# Altium PCB rectangle11board.PcbDoc
Units mil, origin at the board's own origin, x right, y up, seen from the top; angles counter-clockwise.
Board outline 1732.28 x 2598.43 mil, 4 copper layers (Top Layer, Mid-Layer 1, Mid-Layer 2, Bottom Layer), stack 43.512 mil thick; 34 components, 30 nets, 241 pads, 314 vias.
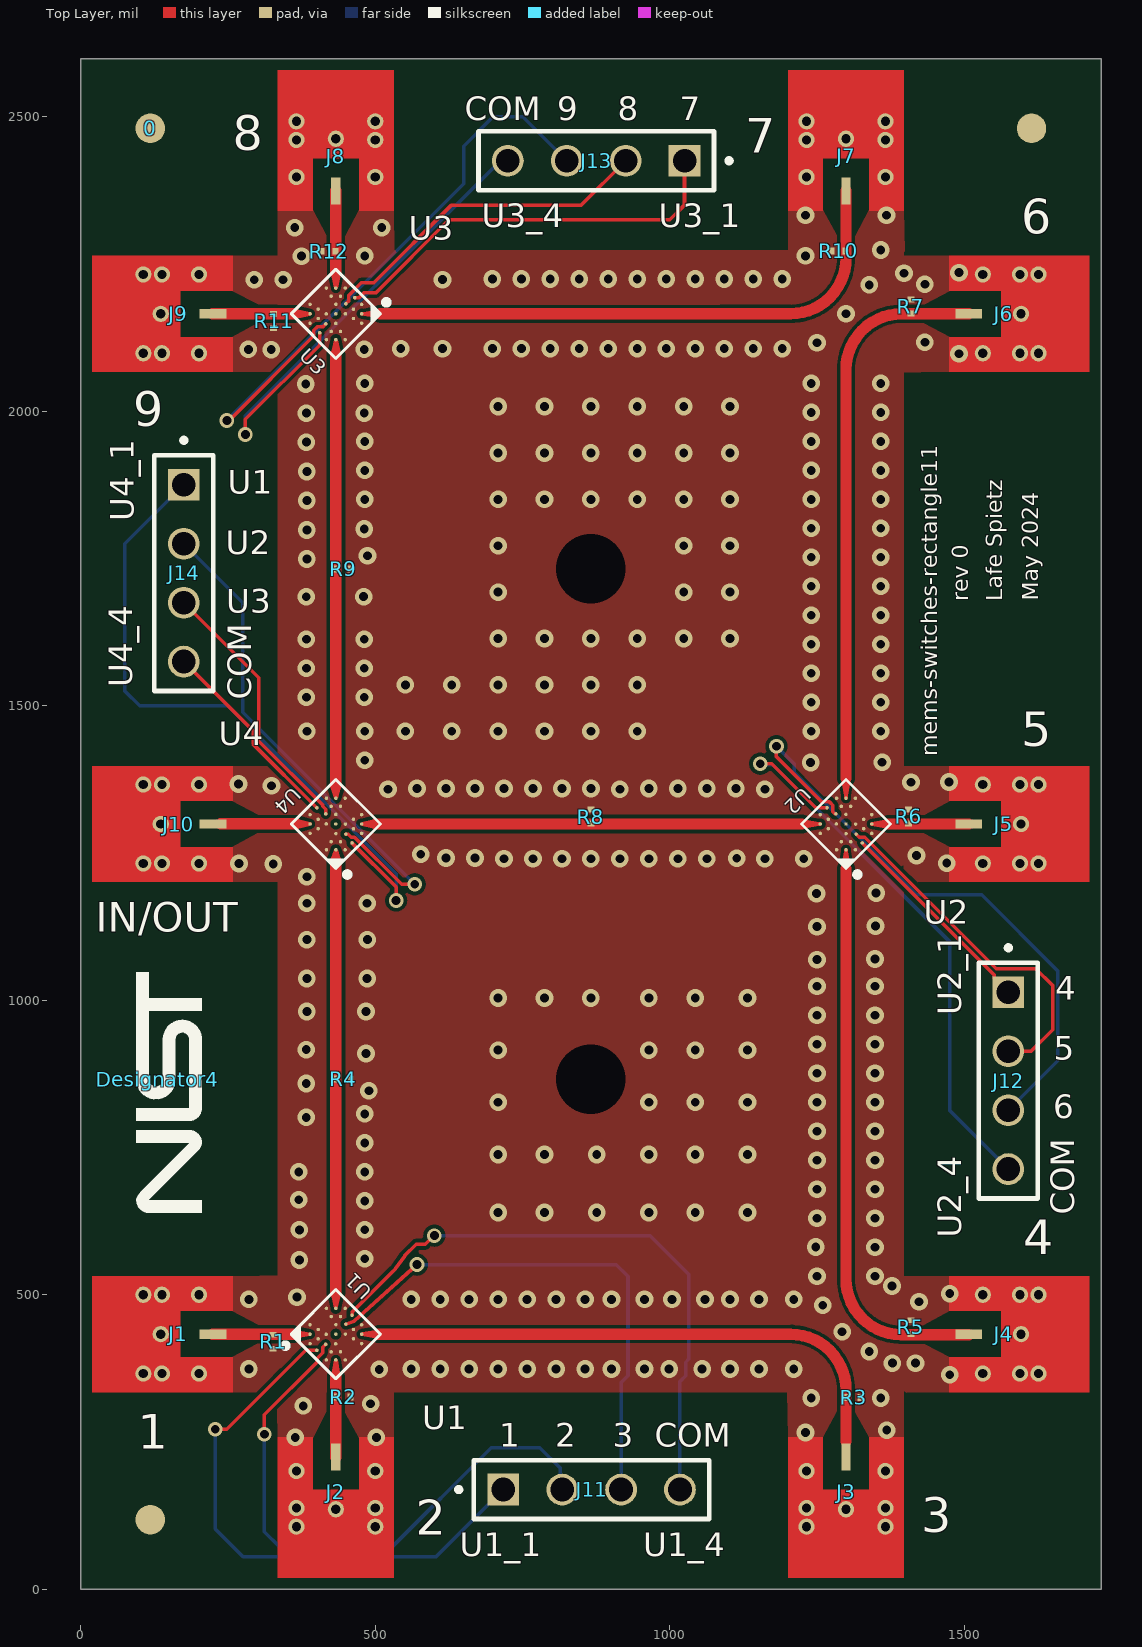
[diagram p0: Top Layer view]
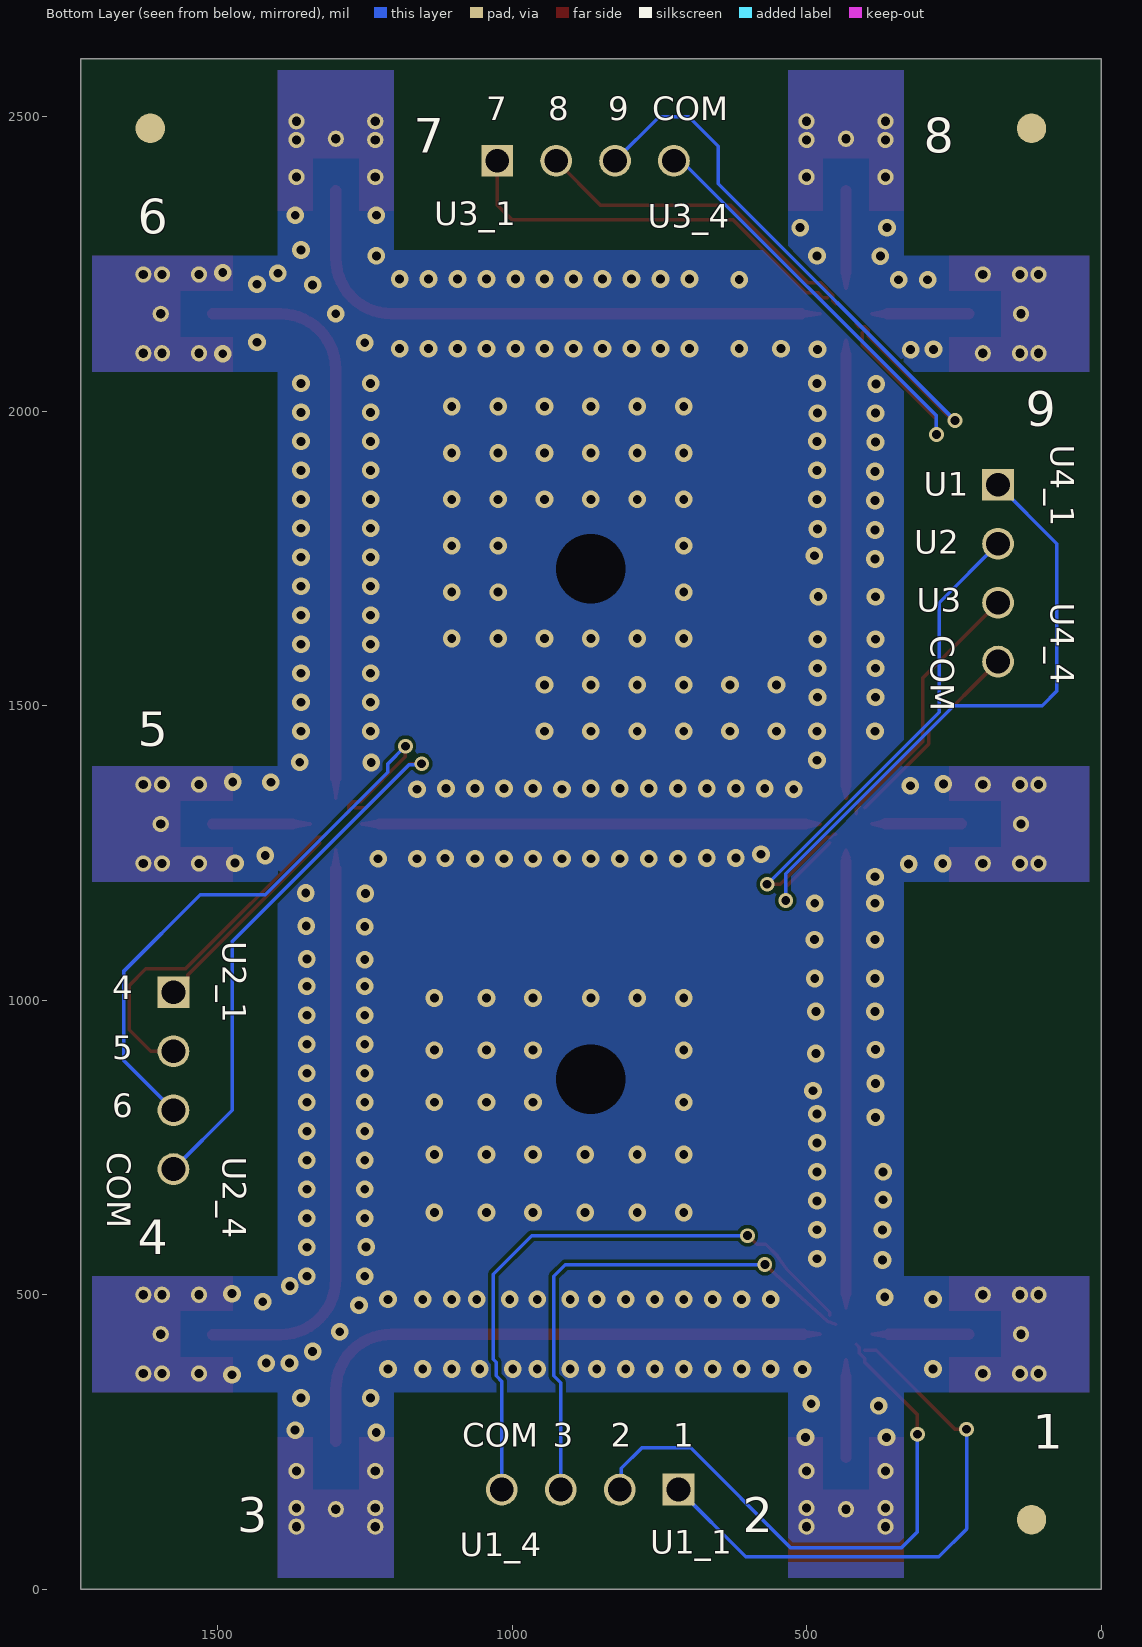
[diagram p1: Bottom Layer view, seen from below]
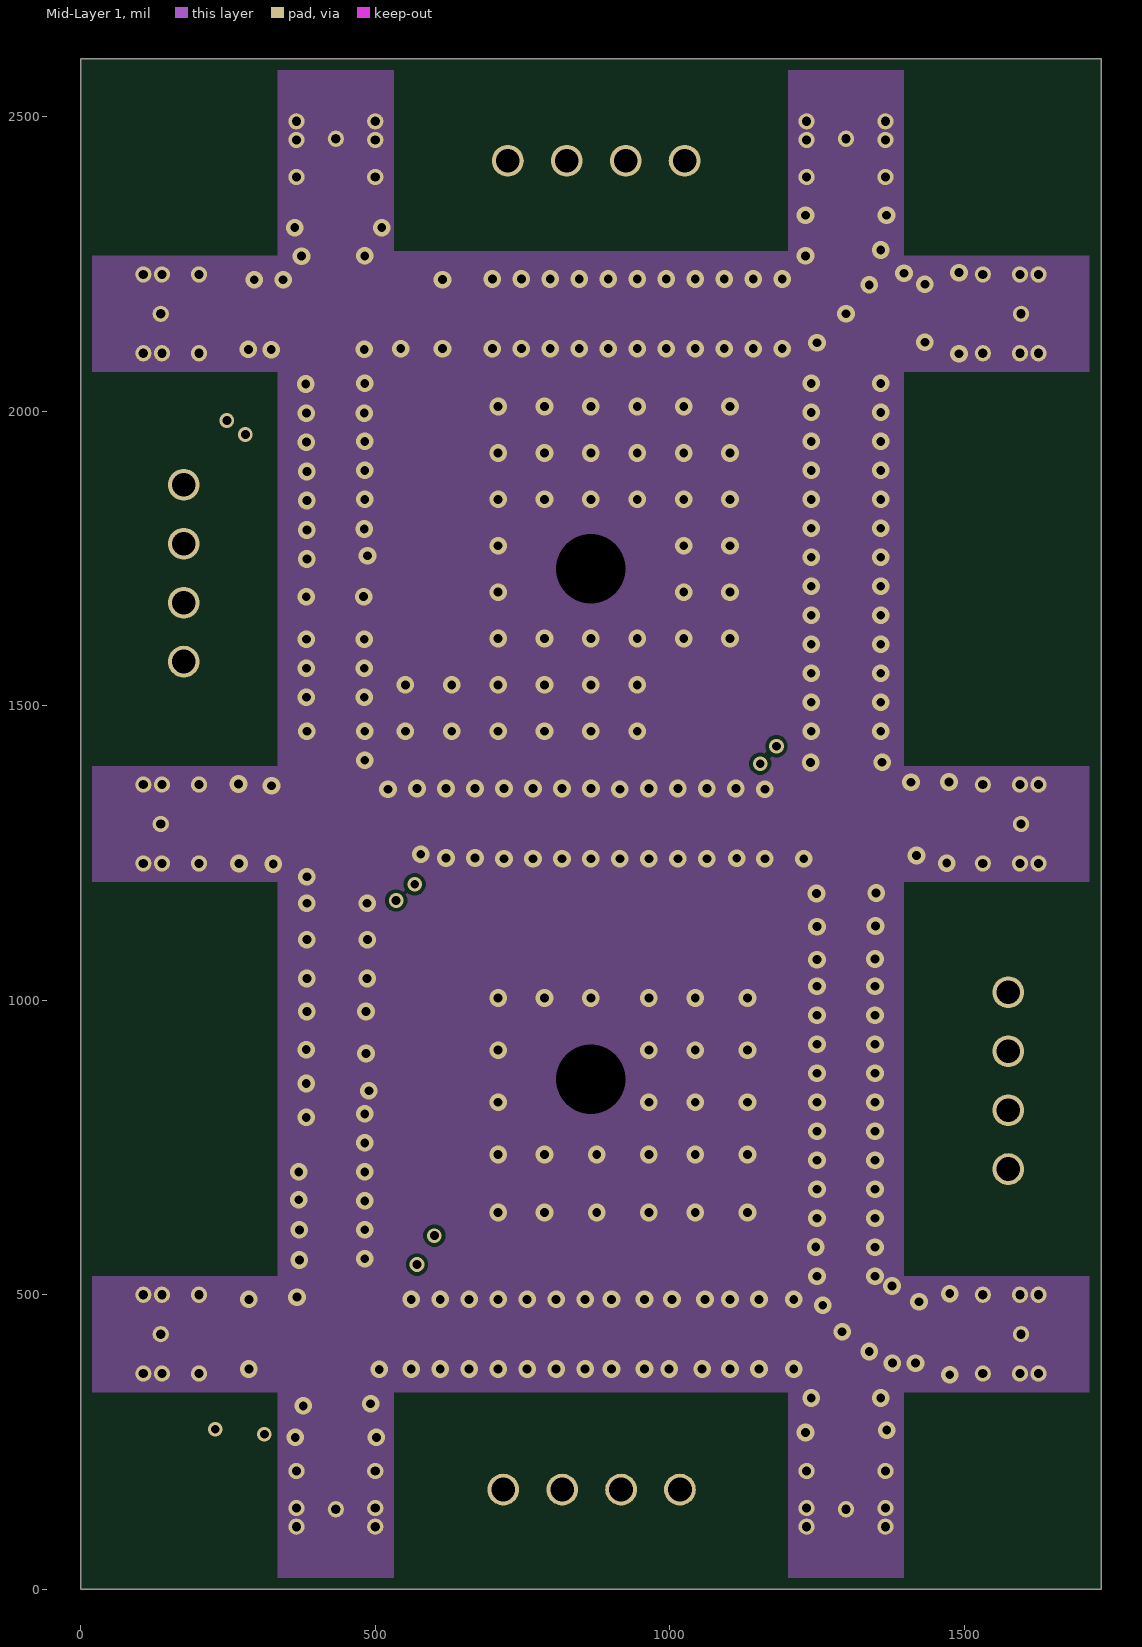
[diagram p2: Mid-Layer 1]
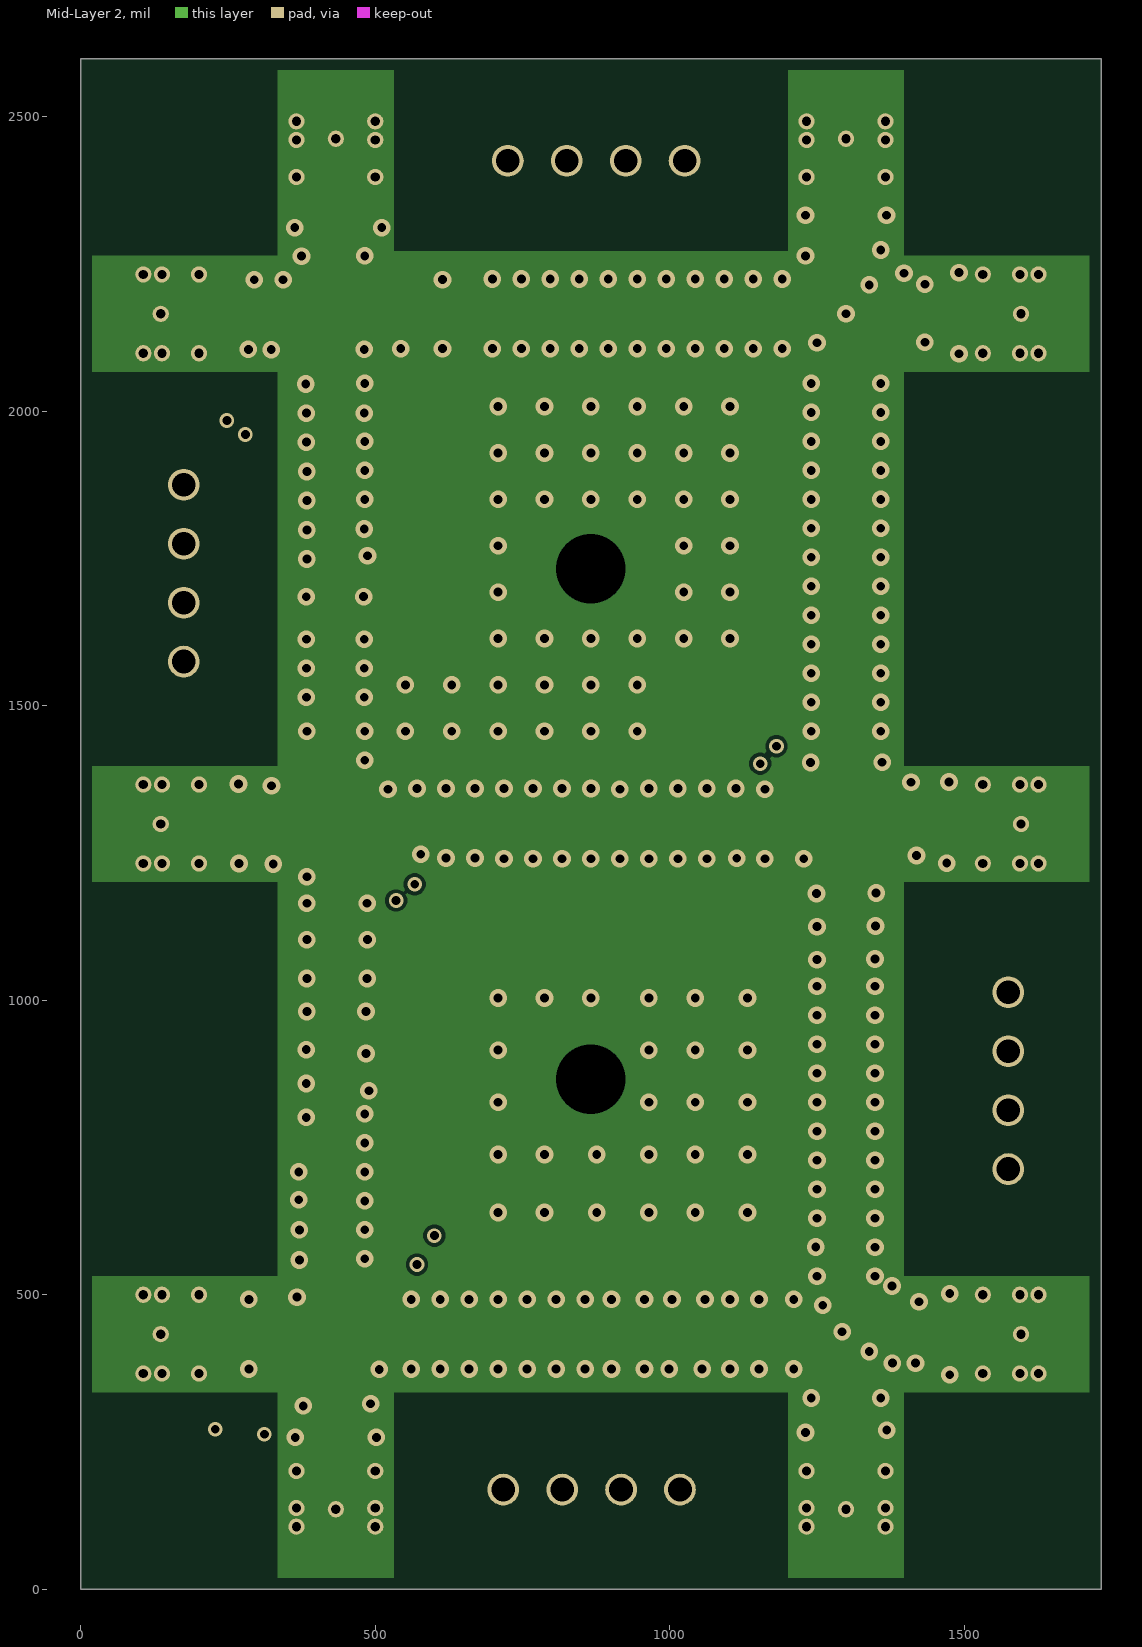
[diagram p3: Mid-Layer 2]

## Layer stack, top to bottom
Top Solder: solder mask 1, SM-001, Dk 4
Top Layer: signal copper 1.378
Core1: dielectric 10, RO4350B, Dk 3.48
Mid-Layer 1: signal copper 1.378
Dielectric 1: prepreg 7, PR7628, Dk 4.24
Dielectric 2: prepreg 4, PR2116, Dk 4.17
Dielectric 3: prepreg 7, PR7628, Dk 4.24
Mid-Layer 2: signal copper 1.378
Core2: dielectric 10, RO-4350B, Dk 3.48
Bottom Layer: signal copper 1.378
Bottom Solder: solder mask 1, SM-001, Dk 4

## Board outline
0,0 0,2598.43 1732.28,2598.43 1732.28,0

## Design rules (kind name [scope] priority, off if disabled: settings)
Clearance [All] p1: gap=10 ignorepadtopadclearanceinfootprint=FALSE except(3.74: Track-Region SMDPad-Region Region-Region; 3.94: Track-Track Track-SMDPad; 4: Track-Fill; 6: Arc-SMDPad Arc-THPad Arc-Poly Track-Poly SMDPad-SMDPad SMDPad-Poly THPad-Poly Via-Poly Fill-Poly Poly-Poly Poly-Region Poly-Hole)
HoleSize [All] p1: absolutevalues=TRUE maxlimit=250 minlimit=1 maxpercent=80.000 minpercent=20.000
PolygonConnect [All] p1: connectstyle=Direct reliefconductorwidth=10 reliefentries=4 polygonreliefangle="90 Angle" airgapwidth=10
RoutingVias [All] p1: holewidth=15 width=25 viastyle="Through Hole" minholewidth=5 minwidth=10 maxholewidth=28 maxwidth=50
SolderMaskExpansion [All] p1: expansion=4 istentingtop=FALSE
Width [All] p1 off: maxlimit=21.65 minlimit=3.94 preferedwidth=10 toplayer_prefwidth=3.94 midlayer1_minwidth=10 midlayer1_maxwidth=10 midlayer2_minwidth=10 midlayer2_maxwidth=10 bottomlayer_minwidth=10 bottomlayer_maxwidth=10 minimp=50.000000 maximp=50.000000 favimp=50.000000
Width cpw-Z-1 [All] p2 off: maxlimit=19.68 minlimit=6.87 preferedwidth=10 toplayer_minwidth=12.7 toplayer_prefwidth=15.98 impedanceprofiledriven=TRUE impedanceprofileid={FF6547F1-1ACB-4B88-A69B-03F59FE56022} minimp=50.000000 maximp=50.000000 favimp=50.000000
29 further rules are at their usual default settings.

## Classes and differential pairs
component class rectangle11board: J1 J2 J3 J4 J5 J6 J7 J8 J9 J10 J11 J12 J13 J14 R1 R2 R3 R4 R5 R6 R7 R8 R9 R10 R11 R12 U1 U2 U3 U4

## Components (designator, comment, footprint, x,y, rotation, side; value= is the part's Value field where it differs from the comment)
0 "Fiducial" fiducial 118.11,2480.32 r90 top
Designator4 "Comment" "NIST logo - TopOverlay" 129.92,866.14 r90 top
J1 "SMP-right-angle-19S201-40ML5" rosenberger-19S201-40ML5 118.11,433.07 r90 top
J2 "SMP-right-angle-19S201-40ML5" rosenberger-19S201-40ML5 433.07,118.11 r180 top
J3 "SMP-right-angle-19S201-40ML5" rosenberger-19S201-40ML5 1299.21,118.11 r180 top
J4 "SMP-right-angle-19S201-40ML5" rosenberger-19S201-40ML5 1614.17,433.07 r270 top
J5 "SMP-right-angle-19S201-40ML5" rosenberger-19S201-40ML5 1614.17,1299.21 r270 top
J6 "SMP-right-angle-19S201-40ML5" rosenberger-19S201-40ML5 1614.17,2165.35 r270 top
J7 "SMP-right-angle-19S201-40ML5" rosenberger-19S201-40ML5 1299.21,2480.32 r0 top
J8 "SMP-right-angle-19S201-40ML5" rosenberger-19S201-40ML5 433.07,2480.32 r0 top
J9 "SMP-right-angle-19S201-40ML5" rosenberger-19S201-40ML5 118.11,2165.35 r90 top
J10 "SMP-right-angle-19S201-40ML5" rosenberger-19S201-40ML5 118.11,1299.21 r90 top
J11 "TSW-104-07-G-S" SAMTEC_TSW-104-07-G-S 867.32,169.29 r0 top
J12 "TSW-104-07-G-S" SAMTEC_TSW-104-07-G-S 1574.8,863.39 r270 top
J13 "TSW-104-07-G-S" SAMTEC_TSW-104-07-G-S 875.2,2425.2 r180 top
J14 "TSW-104-07-G-S" SAMTEC_TSW-104-07-G-S 175,1725 r270 top
R1 "TE connectivity CPF0201B56K2E1" 0201-resistor 326.77,420.28 r270 top value=56k
R2 "TE connectivity CPF0201B56K2E1" 0201-resistor 446.06,326.77 r0 top value=56k
R3 "TE connectivity CPF0201B56K2E1" 0201-resistor 1312.01,325.79 r180 top value=56k
R4 "TE connectivity CPF0201B56K2E1" 0201-resistor 446.06,866.14 r180 top value=56k
R5 "TE connectivity CPF0201B56K2E1" 0201-resistor 1409.45,444.88 r270 top value=56k
R6 "TE connectivity CPF0201B56K2E1" 0201-resistor 1405.51,1312.01 r270 top value=56k
R7 "TE connectivity CPF0201B56K2E1" 0201-resistor 1409.41,2177.65 r90 top value=56k
R8 "TE connectivity CPF0201B56K2E1" 0201-resistor 866.14,1311.81 r90 top value=56k
R9 "TE connectivity CPF0201B56K2E1" 0201-resistor 445.7,1732.28 r0 top value=56k
R10 "TE connectivity CPF0201B56K2E1" 0201-resistor 1286.35,2272.12 r0 top value=56k
R11 "TE connectivity CPF0201B56K2E1" 0201-resistor 327.48,2153.15 r270 top value=56k
R12 "TE connectivity CPF0201B56K2E1" 0201-resistor 420.95,2271.61 r180 top value=56k
U1 "MM5130*" MM5130-NORM_PCB_NOFLOOD 433.07,433.07 r45 top
U2 "MM5130*" MM5130-NORM_PCB_NOFLOOD 1299.21,1299.21 r135 top
U3 "MM5130*" MM5130-NORM_PCB_NOFLOOD 433.07,2165.35 r225 top
U4 "MM5130*" MM5130-NORM_PCB_NOFLOOD 433.07,1299.21 r135 top
? "Fiducial" fiducial 1614.17,2480.32 r0 top
? "Fiducial" fiducial 118.11,118.11 r0 top

## Footprints (in the part's own frame and the unit in brackets; to place one, negate y for a bottom-side part, rotate by r counter-clockwise, add the part's x,y. Pads: shape width x height; smd on the part's side, far side on the other; paste and mask are expansions set on the pad)
0201-resistor [mm]
  rect 0.25x0.3 smd: 1(-0.3,0) 2(0.3,0)
fiducial [mil]
  round 50 / inner round 0 / far side round 50 all layers, no hole paste-99999 mask+50: 1(0,0)
MM5130-NORM_PCB_NOFLOOD [mm]
  round 0.15 smd mask+0.025: 1(-1.072,0.5) 2(-1.072,0.084) 3(-1.072,-0.5) 4(-0.786,-0.786) 5(-0.5,-1.072) 6(0.5,-1.072) 7(0.786,-0.786) 8(1.072,-0.5) 9(1.072,0.084) 10(1.072,0.5) 11(0.786,0.786) 12(0.5,1.072) 13(-0.5,1.072) 14(-0.786,0.786) 15(-0.681,0.396) 16(-0.615,0) 17(-0.681,-0.396) 18(-0.396,-0.681) 19(0.396,-0.681) 20(0.681,-0.396) 21(0.615,0) 22(0.681,0.396) 23(0.396,0.681) 24(-0.396,0.681) 25(-0.295,0.29) 26(-0.295,-0.29) 27(0.295,-0.29) 28(0.295,0.29) 29(0,0)
  silkscreen extent -1.99,-1.36 1.36,1.36, body extent -1.27,-1.27 1.27,1.27, height 0.98
"NIST logo - TopOverlay" [mil]
  silkscreen extent -227,-76 181,35
rosenberger-19S201-40ML5 [mm]
  rect 0.4x1.15 smd: 1(0,-2.7)
  round 0.7 hole 0.4 mask+0: gnd(-1.7,-2.1) gnd(-1.7,-0.5) gnd(-1.7,0.3) gnd(0,-0.45) gnd(1.7,-2.1) gnd(1.7,-0.5) gnd(1.7,0.3)
  Top Layer region: 1,-1.3 1,-3.55 2.5,-3.55 2.5,2.5 -2.5,2.5 -2.5,-3.55 -1,-3.55 -1,-1.3
  body extent -2.5,-2.75 2.5,2.5, height 5
SAMTEC_TSW-104-07-G-S [mm]
  rect 1.37x1.37 / inner round 1.37 / far side rect 1.37x1.37 hole 1.02: 01(-3.81,0)
  round 1.37 hole 1.02: 02(-1.27,0) 03(1.27,0) 04(3.81,0)
  silkscreen extent -5.83,-1.27 5.08,1.27

## Part data
J1 J2 J3 J4 J5 J6 J7 J8 J9 J10: "SMOOTH BORE SMP Connector Plug, Male Pin 50Ohm Surface Mount Solder", Package=None, Supplier Part Number 1=476-19S201-40ML5, Availability="In Stock", Check_prices=https://www.snapeda.com/parts/853050232/Molex/view-part/?ref=eda, MF=Molex, MP=853050232, Price=None, Purchase-URL=https://pricing.snapeda.com/search/part/853050232/?ref=eda, SnapEDA_Link=https://www.snapeda.com/parts/853050232/Molex/view-part/?ref=snap, Supplier 1=Mouser
J11 J12 J13 J14: "<a href=\"https://pricing.snapeda.com/parts/TSW-104-07-G-S/Samtec/view-part?ref=eda\">Check availability</a>", Package=None, Availability=Unavailable, MP=altium_native_batch, Price=None
R1 R2 R3 R4 R5 R6 R7 R8 R9 R10 R11 R12: "CPF 0201 56K2 0.1% 25PPM 1K RL", Mfgr Part No.=CPF0201B56K2E1, Package=None, Availability=Unavailable, Mfgr="TE connectivity", MP=ERJ1GN0R00C, Price=None
U1 U2 U3 U4: library part IC-MM5130, "High power SP4T MEMs switch"

## Free pads (board coordinates)
  round 60 hole 118.11: 8(866.14,1732.28) 9(866.14,866.14)

## Via types
v1: diameter 30, hole 15, Top Layer to Bottom Layer, 304 vias
v2: diameter 25, hole 15, Top Layer to Bottom Layer, 10 vias

## Nets (pads, with @x,y where several pads share a name; then routed paths per layer and width w, separated by ;. In a path a pad name is that pad's centre, name@x,y a point inside that pad or via, vN(x,y) a via of type N, cw(c..) or ccw(c..) an arc to the next point about the centre after c; other vN are vias at no path point)
GND: J1.gnd J2.gnd J3.gnd J4.gnd J5.gnd J6.gnd J7.gnd J8.gnd J9.gnd J10.gnd pad.8 pad.9 R1.2 R2.2 R3.1 R4.1 R5.1 R6.1 R7.2 R8.2 R9.2 R10.1 R11.2 R12.2 U1.1 U1.3 U1.5 U1.6 U1.8 U1.10 U1.12 U1.13 U1.15 U1.17 U1.18 U1.19 U1.20 U1.22 U1.23 U1.24 U1.25 U1.26 U1.27 U1.28 U2.1 U2.3 U2.5 U2.6 U2.8 U2.10 U2.12 U2.13 U2.15 U2.17 U2.18 U2.19 U2.20 U2.22 U2.23 U2.24 U2.25 U2.26 U2.27 U2.28 U3.1 U3.3 U3.5 U3.6 U3.8 U3.10 U3.12 U3.13 U3.15 U3.17 U3.18 U3.19 U3.20 U3.22 U3.23 U3.24 U3.25 U3.26 U3.27 U3.28 U4.1 U4.3 U4.5 U4.6 U4.8 U4.10 U4.12 U4.13 U4.15 U4.17 U4.18 U4.19 U4.20 U4.22 U4.23 U4.24 U4.25 U4.26 U4.27 U4.28
  other v1: 364.17,257.87 501.97,257.87 1230.58,266.25 1368.38,270.18 377.64,311.33 492.13,314.96 1240.16,324.8 1358.27,324.8 1475.39,364.17 285.43,374.02 506.86,373.27 561.02,374.02 610.24,374.02 659.45,374.02 708.66,374.02 757.87,374.02 807.09,374.02 856.3,374.02 901.13,374.02 957.13,374.02 998.92,374.02 1054.92,374.02 1102.36,374.02 1151.57,374.02 1210.63,374.02 1377.95,383.86 1417.32,383.86 1338.58,403.54 1292.68,437.11 1259.84,482.28 1423.23,488.19 285.43,492.13 561.02,492.13 610.24,492.13 659.45,492.13 708.66,492.13 757.87,492.13 807.09,492.13 856.3,492.13 901.13,492.13 957.13,492.13 1003.94,492.13 1059.94,492.13 1102.36,492.13 1151.57,492.13 1210.63,492.13 367.24,495.95 1475.39,501.97 1377.3,514.73 1250,531.5 1348.43,531.5 371.18,558.94 482.28,561.02 1348.43,580.71 1247.75,581.15 371.18,610.12 482.28,610.24 1250,629.92 1348.43,629.92 708.66,639.76 787.4,639.76 875.98,639.76 964.57,639.76 1043.31,639.76 1131.89,639.76 482.28,659.45 370.08,661.42 1250,679.13 1348.43,679.13 370.08,708.66 482.28,708.66 1250,728.35 1348.43,728.35 708.66,738.19 787.4,738.19 875.98,738.19 964.57,738.19 1043.31,738.19 1131.89,738.19 482.28,757.87 1250,777.56 1348.43,777.56 382.87,801.18 482.28,807.09 708.66,826.77 964.57,826.77 1043.31,826.77 1131.89,826.77 1250,826.77 1348.43,826.77 489.17,846.46 382.99,858.71 1250,875.98 1348.43,875.98 484.25,909.45 708.66,915.35 964.57,915.35 1043.31,915.35 1131.89,915.35 382.99,916.21 1250,925.2 1348.43,925.2 1250,974.41 1348.43,974.41 383.86,980.97 484.25,980.97 708.66,1003.94 787.4,1003.94 866.14,1003.94 964.57,1003.94 1043.31,1003.94 1131.89,1003.94 1250,1023.62 1348.43,1023.62 383.86,1036.97 486.22,1036.97 1250,1069 1348.43,1069.98 383.86,1102.91 486.69,1102.91 1250,1125 1349.41,1125.98 383.86,1164.71 486.22,1164.71 1249.02,1181.1 1350.39,1181.98 383.86,1209.65 326.77,1231.3 268.7,1232.28 1470.25,1232.78 718.5,1240.16 767.72,1240.16 816.93,1240.16 866.14,1240.16 915.35,1240.16 964.57,1240.16 1013.78,1240.16 1062.99,1240.16 1113.71,1240.95 1161.42,1240.16 1227.36,1240.16 620.11,1241.42 669.32,1241.42 1418.91,1245.68 577.25,1247.78 521.65,1358.27 915.35,1358.27 1161.42,1358.27 570.89,1359.53 620.11,1359.53 669.32,1359.53 718.53,1359.53 767.74,1359.53 816.96,1359.53 866.17,1359.53 964.59,1359.53 1013.81,1359.53 1063.02,1359.53 1112.23,1359.53 323.83,1364.18 267.72,1367.13 1409.45,1370.08 1474.19,1370.58 1239.17,1403.54 1360.5,1404.04 482.28,1407.48 383.86,1456.69 482.28,1456.69 551.18,1456.69 629.92,1456.69 708.66,1456.69 787.4,1456.69 866.14,1456.69 944.88,1456.69 1240.16,1456.69 1358.27,1456.69 1240.16,1505.91 1358.27,1505.91 383.04,1514.5 481.46,1514.5 551.18,1535.43 629.92,1535.43 708.66,1535.43 787.4,1535.43 866.14,1535.43 944.88,1535.43 1240.16,1555.12 1358.27,1555.12 383.04,1563.71 481.46,1563.71 1240.16,1604.33 1358.27,1604.33 383.04,1612.93 481.46,1612.93 708.66,1614.17 787.4,1614.17 866.14,1614.17 944.88,1614.17 1023.62,1614.17 1102.36,1614.17 1240.16,1653.54 1358.27,1653.54 382.87,1685.04 480.32,1685.28 708.66,1692.91 1023.62,1692.91 1102.36,1692.91 1240.16,1702.76 1358.27,1702.76 383.86,1749.02 1240.16,1751.97 1358.27,1751.97 486.83,1754.66 708.66,1771.65 1023.62,1771.65 1102.36,1771.65 383.86,1798.23 481.46,1799.94 1240.16,1801.18 1358.27,1801.18 383.86,1848.43 482.28,1850.39 708.66,1850.39 787.4,1850.39 866.14,1850.39 944.88,1850.39 1023.62,1850.39 1102.36,1850.39 1240.16,1850.39 1358.27,1850.39 383.86,1897.64 482.28,1899.61 1240.16,1899.61 1358.27,1899.61 708.66,1929.13 787.4,1929.13 866.14,1929.13 944.88,1929.13 1023.62,1929.13 1102.36,1929.13 383.04,1947.57 482.28,1948.82 1240.16,1948.82 1358.27,1948.82 383.04,1996.79 481.46,1996.79 1240.16,1998.03 1358.27,1998.03 708.66,2007.87 787.4,2007.87 866.14,2007.87 944.88,2007.87 1023.62,2007.87 1102.36,2007.87 381.89,2046.26 482.28,2047.24 1240.16,2047.24 1358.27,2047.24 1491.14,2097.44 323.41,2104.54 284.61,2105.05 481.46,2105.05 543.31,2106.3 614.17,2106.3 698.82,2106.3 748.03,2106.3 797.24,2106.3 846.46,2106.3 895.67,2106.3 944.88,2106.3 994.09,2106.3 1043.31,2106.3 1092.52,2106.3 1141.73,2106.3 1190.94,2106.3 1250,2116.14 1433.07,2117.13 1299.21,2165.35 1338.58,2214.57 1433.07,2215.55 294.46,2223.16 343.67,2223.16 614.17,2223.43 698.82,2224.41 748.03,2224.41 797.24,2224.41 846.46,2224.41 895.67,2224.41 944.88,2224.41 994.09,2224.41 1043.31,2224.41 1092.52,2224.41 1141.73,2224.41 1190.94,2224.41 1397.64,2234.25 1491.14,2235.24 374.76,2263.31 482.28,2263.78 1230.32,2263.78 1358.27,2273.62 363.35,2311.75 510.99,2311.75 1230.32,2332.68 1368.11,2332.68
NetJ1_1: J1.1 R1.1 U1.14 | length 164.9
  Top Layer w5: 360.24,433.07 U1.14
  Top Layer w19.5: J1.1 360.24,433.07
NetJ2_1: J2.1 R2.1 U1.4 | length 164.9
  Top Layer w6: 433.07,361.22 U1.4
  Top Layer w19.5: J2.1 433.07,326.77 433.07,336.61 433.07,361.22
NetJ3_1: J3.1 R3.2 U1.7 | length 963.9
  Top Layer w6: U1.7 505.91,433.07
  Top Layer w19.5: 505.91,433.07 1204.72,433.07 cw(c1204.72,338.58) 1299.21,338.58 1299.21,330.71 1299.21,250.98
NetJ4_1: J4.1 R5.2 U2.14 | length 991.5
  Top Layer w6: 1299.21,1223.43 U2.14
  Top Layer w19.5: 1299.21,1223.43 1299.21,526.57 ccw(c1393.7,526.57) 1392.85,432.09 J4.1@1507.85,432.09
NetJ5_1: J5.1 R6.2 U2.4 | length 164.9
  Top Layer w6: U2.4 1372.05,1299.21
  Top Layer w19.5: 1372.05,1299.21 1405.51,1299.21 J5.1
NetJ6_1: J6.1 R7.1 U2.7 | length 990.5
  Top Layer w6: U2.7 1299.21,1376.97
  Top Layer w19.5: 1299.21,1376.97 1299.21,2070.87 cw(c1393.7,2070.87) 1393.7,2165.35 1407.48,2165.35 J6.1
NetJ7_1: J7.1 R10.2 U3.14 | length 990.5
  Top Layer w5.91: U3.14 508.86,2165.35
  Top Layer w19.5: 508.86,2165.35 1084.65,2165.35 1204.72,2165.35 ccw(c1204.72,2259.84) 1299.21,2259.84 1299.21,2274.61 1299.21,2280.09 1299.21,2280.51 J7.1
NetJ8_1: J8.1 R12.1 U3.4 | length 164.9
  Top Layer w5.91: U3.4 433.07,2235.24
  Top Layer w19.5: 433.07,2235.24 433.07,2271.03 J8.1
NetJ9_1: J9.1 R11.1 U3.7 | length 164.9
  Top Layer w5.91: 363.19,2165.35 U3.7
  Top Layer w19.5: J9.1 327.73,2165.35 363.19,2165.35
NetJ10_1: J10.1 U4.11 | length 152
  Top Layer w6: 366.28,1299.26 U4.11
  Top Layer w19.5: J10.1@237.3,1299.26 366.28,1299.26
NetJ11_01: J11.01 U1.2 | length 953.1
  Top Layer w6: v2(228.35,271.65) 248.03,271.65 381.94,405.57 U1.2
  Bottom Layer w6: v2(228.35,271.65) 228.35,102.36 275.59,55.12 603.15,55.12 J11.01
NetJ11_02: J11.02 U1.16 | length 996.9
  Top Layer w6: v2(311.76,263.04) 311.76,296.02 401.57,385.83 401.57,392.11 410.89,401.42 410.89,410.89 U1.16
  Bottom Layer w6: v2(311.76,263.04) 311.76,97.69 338.58,70.87 527.56,70.87 696.85,240.16 779.53,240.16 814.43,205.26 814.43,172.19 J11.02
NetJ11_03: J11.03 U1.21 | length 891.9
  Top Layer w6: U1.21 464.69,455.32 v2(570.87,551.18)
  Bottom Layer w6: v2(570.87,551.18) 909.45,551.18 929.13,531.5 929.13,362.42 917.32,350.61 J11.03
NetJ11_04: J11.04 U1.9 | length 1031.6
  Top Layer w6: U1.9 460.58,470.42 530.15,539.99 533.66,543.51 550.28,566.23 550.28,566.66 569.33,585.71 584.68,585.71 599.36,600.39 v2(600.39,600.39)
  Bottom Layer w6: v2(600.39,600.39) 966.54,600.39 1031.94,534.99 1031.94,390.63 1026.92,385.61 1026.92,362.42 1017.32,352.82 J11.04
NetJ12_01: J12.01 U2.2 | length 366.9
  Top Layer w6: U2.2 1550.83,1042.91 1550.83,1037.35 1578.29,1009.9 J12.01@1583.85,1009.9
NetJ12_02: J12.02 U2.16 | length 605.5
  Top Layer w6: U2.16 1321.46,1276.97 1330.83,1276.97 1554.45,1053.35 1621.65,1053.35 1650,1025 1650,950 1613.39,913.39 J12.02
NetJ12_03: J12.03 U2.21 | length 1080.7
  Top Layer w6: v2(1181.1,1431.25) 1181.1,1413.39 1257.83,1336.65 1271.15,1336.65 1276.97,1330.83 1276.97,1319.85 1280.48,1316.33 U2.21
  Bottom Layer w6: v2(1181.1,1431.25) 1211.17,1401.18 1211.17,1387.25 1419.2,1179.23 1529.43,1179.23 1658.93,1049.73 1658.93,897.51 J12.03
NetJ12_04: J12.04 U2.9 | length 1018.7
  Top Layer w6: v2(1153.54,1401.57) 1173.23,1401.57 1248.09,1326.72 U2.9
  Bottom Layer w6: v2(1153.54,1401.57) 1155.36,1399.76 1175.04,1399.76 1475,1099.8 1475,813.19 J12.04
NetJ13_01: J13.01 U3.2 | length 700.1
  Top Layer w6: U3.2 472.39,2192.86 480.32,2200.79 500.59,2200.79 624.8,2325 1000,2325 1025,2350 1025,2425 J13.01
NetJ13_02: J13.02 U3.16 | length 581
  Top Layer w6: U3.16 455.32,2187.6 455.32,2196.98 476.38,2218.04 497.57,2218.04 629.53,2350 850,2350 J13.02
NetJ13_03: J13.03 U3.21 | length 1100.5
  Top Layer w6: v2(248.03,1984.25) 251.97,1984.25 395.63,2127.91 395.63,2137.29 401.45,2143.11 410.83,2143.11 U3.21
  Bottom Layer w6: v2(248.03,1984.25) 650,2386.22 650,2450 700,2500 750.39,2500 J13.03
NetJ13_04: J13.04 U3.9 | length 877.3
  Top Layer w6: v2(279.53,1960.63) 279.53,1986.22 405.57,2112.26 U3.9
  Bottom Layer w6: v2(279.53,1960.63) 279.53,1992.13 J13.04@718.7,2431.3
NetJ14_01: J14.01 U4.2 | length 1154.5
  Top Layer w6: U4.2 535.43,1192.17 v2(535.43,1169.29)
  Bottom Layer w6: J14.01 75,1775 75,1525 100,1500 250,1500 535.43,1214.57 v2(535.43,1169.29)
NetJ14_02: J14.02 U4.16 | length 892.5
  Top Layer w6: U4.16 454.13,1282.09 459.25,1276.97 464.69,1276.97 544.81,1196.85 v2(566.93,1196.85)
  Bottom Layer w6: J14.02 275,1675 275,1489.05 566.93,1197.12 v2(566.93,1196.85)
NetJ14_03: J14.03 U4.21 | length 458.5
  Top Layer w6: J14.03 302.47,1547.53 302.47,1439.91 410.83,1331.55 410.83,1329.52 415.95,1324.4 U4.21
NetJ14_04: J14.04 U4.9 | length 341.8
  Top Layer w6: J14.04 292.53,1457.47 292.53,1435.08 U4.9
NetR4_2: R4.2 U1.11 U4.14 | length 778.6
  Top Layer w5: U1.11 433.07,502.95
  Top Layer w5.91: 433.07,1236.22 U4.14
  Top Layer w19.5: 433.07,502.95 433.07,1236.22
NetR8_1: R8.1 U2.11 U4.4 | length 778.6
  Top Layer w5.91: U4.4 500.98,1299.21
  Top Layer w6: 1224.41,1299.21 U2.11
  Top Layer w19.5: 500.98,1299.21 1224.41,1299.21
NetR9_1: R9.1 U3.11 U4.7 | length 778.6
  Top Layer w5.91: 433.07,2096.46 U3.11
  Top Layer w6: U4.7 433.07,1364.17
  Top Layer w19.5: 433.07,1364.17 433.07,2096.46
pads on no net: 0.1 ?.1 U1.29 U2.29 U3.29 U4.29

## Polygon pours and split planes (outlines as drawn)
GND on Top Layer "GND_L01_P000" (solid, pour order 0): 334.65,334.65 1397.64,334.65 1397.64,2273.62 334.65,2273.62
GND on Top Layer "NONET_L02_P-001" (solid, pour order 21): 1475.89,1259.84 1428.64,1284.45 1428.64,1312.99 1475.89,1338.58 1475.89,1397.64 1397.64,1397.64 1397.64,1199.74 1475.89,1200.79
GND on Top Layer "NONET_L02_P-001" (solid, pour order 19): 256.4,1338.58 303.64,1313.98 303.64,1285.43 256.4,1259.84 256.4,1200.79 364.72,1200.79 364.72,1397.64 256.4,1397.64
GND on Top Layer "NONET_L02_P-001" (solid, pour order 24): 472.44,2342.03 447.83,2294.78 419.29,2294.78 393.7,2342.03 334.65,2342.03 334.65,2268.21 532.48,2268.21 531.5,2342.03
GND on Top Layer "NONET_L02_P-001" (solid, pour order 23): 1338.58,2342.03 1313.98,2294.78 1285.43,2294.78 1259.84,2342.03 1200.79,2342.03 1200.79,2268.21 1398.62,2268.21 1397.64,2342.03
GND on Top Layer "NONET_L02_P-001" (solid, pour order 22): 1475.89,2125.98 1428.64,2150.59 1428.64,2179.13 1475.89,2204.72 1475.89,2263.78 1373.54,2263.78 1373.54,2065.56 1475.89,2066.93
GND on Top Layer "NONET_L02_P-001" (solid, pour order 20): 256.4,2204.72 303.64,2180.12 303.64,2151.57 256.4,2125.98 256.4,2066.93 354.33,2066.93 354.33,2265.09 256.4,2263.78
GND on Top Layer "NONET_L02_P-001" (solid, pour order 18): 256.4,472.44 303.64,447.83 303.64,419.29 256.4,393.7 256.4,334.65 354.33,334.65 354.33,532.8 256.4,531.5
GND on Top Layer "NONET_L02_P-001" (solid, pour order 17): 1475.39,393.7 1428.15,418.31 1428.15,446.85 1475.39,472.44 1475.39,531.5 1397.64,531.5 1397.64,333.61 1475.39,334.65
GND on Top Layer "NONET_L02_P-001" (solid, pour order 16): 393.7,256.4 418.31,303.64 446.85,303.64 472.44,256.4 531.5,256.4 531.5,347.57 333.43,347.57 334.65,256.4
GND on Top Layer "NONET_L02_P-001" (solid, pour order 15): 1259.84,257.87 1284.45,305.12 1312.99,305.12 1338.58,257.87 1397.64,257.87 1397.64,338.58 1199.71,338.58 1200.79,257.87
GND on Bottom Layer "NONET_L02_P-001" (solid, pour order 26): 334.65,334.65 1397.64,334.65 1397.64,2273.62 334.65,2273.62
GND on Bottom Layer "GND_L04_P035" (solid, pour order 35): 334.65,1200.79 19.69,1200.79 19.69,1397.64 334.65,1397.64
GND on Bottom Layer "GND_L04_P036" (solid, pour order 36): 334.65,334.65 19.69,334.65 19.69,531.5 334.65,531.5
GND on Bottom Layer "GND_L04_P034" (solid, pour order 34): 334.65,2066.93 19.69,2066.93 19.69,2263.78 334.65,2263.78
GND on Bottom Layer "GND_L04_P033" (solid, pour order 33): 334.65,2263.78 334.65,2578.74 531.5,2578.74 531.5,2263.78
GND on Bottom Layer "GND_L04_P032" (solid, pour order 32): 1200.79,2263.78 1200.79,2578.74 1397.64,2578.74 1397.64,2263.78
GND on Bottom Layer "GND_L04_P031" (solid, pour order 31): 1397.64,2263.78 1712.6,2263.78 1712.6,2066.93 1397.64,2066.93
GND on Bottom Layer "GND_L04_P030" (solid, pour order 30): 1397.64,1397.64 1712.6,1397.64 1712.6,1200.79 1397.64,1200.79
GND on Bottom Layer "GND_L04_P029" (solid, pour order 29): 1397.64,531.5 1712.6,531.5 1712.6,334.65 1397.64,334.65
GND on Bottom Layer "GND_L04_P028" (solid, pour order 28): 1397.64,334.65 1397.64,19.68 1200.79,19.68 1200.79,334.65
GND on Bottom Layer "GND_L04_P027" (solid, pour order 27): 531.5,334.65 531.5,19.68 334.65,19.68 334.65,334.65
no net on Top Solder "NONET_L-01_P-001" (solid): 508.86,2083.66 508.86,2273.62 1390.75,2273.62 1390.75,2083.66
no net on Top Solder "NONET_L02_P-001" (solid): 334.65,511.81 334.65,1220.47 541.34,1220.47 541.34,511.81
no net on Top Solder "NONET_L-01_P-001" (solid): 341.54,532.48 187.99,532.48 187.99,472.58 187.92,472.51 187.99,472.44 187.99,448.82 255.91,448.82 255.91,417.32 187.99,417.32 187.99,334.65 343.7,334.65 356.3,347.25 356.3,531.5 342.52,531.5
no net on Top Solder "NONET_L-01_P-001" (solid): 356.3,432.09 439.96,515.75 356.3,515.75
no net on Top Solder "NONET_L-01_P-001" (solid): 509.84,434.06 434.06,509.84 438.98,514.76 526.57,514.76 526.57,434.06
no net on Top Solder "NONET_L-01_P-001" (solid): 527.56,1316.93 426.18,1215.55 527.56,1215.55
no net on Top Solder "NONET_L-01_P-001" (solid): 439.96,1215.55 356.3,1299.21 356.3,1215.55
no net on Top Solder "NONET_L02_P-001" (solid): 1220.47,1405.51 1220.47,531.5 510.83,531.5 510.83,1405.51
no net on Top Solder "NONET_L02_P-001" (solid): 509.84,531.5 1210.63,531.5 1210.63,334.65 501.97,334.65 1210.63,334.65 509.84,334.65
no net on Top Solder "NONET_L-01_P-001" (solid): 341.54,1398.62 187.99,1398.62 187.99,1338.72 187.92,1338.65 187.99,1338.58 187.99,1314.96 255.91,1314.96 255.91,1283.46 187.99,1283.46 187.99,1200.79 343.7,1200.79 356.3,1213.39 356.3,1397.64 342.52,1397.64
no net on Top Solder "NONET_L02_P-001" (solid): 531.5,1377.95 531.5,2086.61 334.65,2086.61 334.65,1377.95 334.65,2086.61 334.65,1377.95
no net on Top Solder "NONET_L-01_P-001" (solid): 509.84,1299.21 434.06,1375 438.98,1379.92 526.57,1379.92 526.57,1299.21
no net on Top Solder "NONET_L-01_P-001" (solid): 508.86,2167.32 425.2,2083.66 508.86,2083.66
no net on Top Solder "NONET_L-01_P-001" (solid): 356.3,1297.24 439.96,1380.91 356.3,1380.91
no net on Top Solder "NONET_L-01_P-001" (solid): 340.55,2264.76 187.01,2264.76 187.01,2204.86 186.94,2204.79 187.01,2204.72 187.01,2181.1 254.92,2181.1 254.92,2149.61 187.01,2149.61 187.01,2066.93 342.71,2066.93 355.32,2079.53 355.32,2263.78 341.54,2263.78
no net on Top Solder "NONET_L-01_P-001" (solid): 438.98,2083.66 355.32,2167.32 355.32,2083.66
no net on Top Solder "NONET_L-01_P-001" (solid): 1390.75,2065.94 1544.29,2065.94 1544.29,2125.84 1544.36,2125.92 1544.29,2125.99 1544.29,2149.61 1476.38,2149.61 1476.38,2181.1 1544.29,2181.1 1544.29,2263.78 1388.58,2263.78 1375,2250.19 1375,2066.93 1389.76,2066.93
no net on Top Solder "NONET_L-01_P-001" (solid): 1398.62,2257.87 1398.62,2411.42 1338.72,2411.42 1338.65,2411.49 1338.58,2411.42 1314.96,2411.42 1314.96,2343.5 1283.46,2343.5 1283.46,2411.42 1200.79,2411.42 1200.79,2255.71 1201.58,2254.92 1397.64,2254.92 1397.64,2256.89
no net on Top Solder "NONET_L-01_P-001" (solid): 1391.24,333.66 1544.78,333.66 1544.78,393.56 1544.85,393.63 1544.78,393.7 1544.78,417.32 1476.87,417.32 1476.87,448.82 1544.78,448.82 1544.78,531.5 1389.08,531.5 1388.29,530.71 1388.29,334.65 1390.26,334.65
no net on Top Solder "NONET_L-01_P-001" (solid): 333.66,340.55 333.66,187.01 393.56,187.01 393.63,186.94 393.7,187.01 417.32,187.01 417.32,254.92 448.82,254.92 448.82,187.01 531.5,187.01 531.5,342.71 523.82,350.39 334.65,350.39 334.65,341.54
no net on Top Solder "NONET_L-01_P-001" (solid): 509.84,434.06 426.18,350.39 509.84,350.39
no net on Top Solder "NONET_L02_P-001" (solid): 1397.64,1012.8 1397.64,1210.63 1210.63,1210.63 1210.63,343.5 1397.24,343.5 1397.24,1012.8
no net on Top Solder "NONET_L-01_P-001" (solid): 508.86,2167.32 429.8,2246.38 437.36,2253.94 525.59,2253.94 525.59,2167.32
no net on Top Solder "NONET_L-01_P-001" (solid): 532.48,2256.89 532.48,2410.43 472.58,2410.43 472.51,2410.5 472.44,2410.43 448.82,2410.43 448.82,2342.52 417.32,2342.52 417.32,2410.43 334.65,2410.43 334.65,2254.73 340.36,2249.02 531.5,2249.02 531.5,2255.91
no net on Top Solder "NONET_L-01_P-001" (solid): 439.96,350.39 356.3,434.06 356.3,350.39
no net on Top Solder "NONET_L-01_P-001" (solid): 355.32,2165.35 443.98,2254.02 355.32,2254.02
no net on Top Solder "NONET_L-01_P-001" (solid): 1391.73,1199.8 1545.28,1199.8 1545.28,1259.7 1545.35,1259.77 1545.28,1259.85 1545.28,1283.46 1477.36,1283.46 1477.36,1314.96 1545.28,1314.96 1545.28,1397.64 1389.57,1397.64 1388.78,1396.85 1388.78,1200.79 1390.75,1200.79
no net on Top Solder "NONET_L-01_P-001" (solid): 1199.8,340.55 1199.8,187.01 1259.7,187.01 1259.77,186.94 1259.85,187.01 1283.46,187.01 1283.46,254.92 1314.96,254.92 1314.96,187.01 1397.64,187.01 1397.64,342.71 1396.85,343.5 1200.79,343.5 1200.79,341.54
no net on Top Solder "NONET_L-01_P-001" (solid): 1298.26,1400.08 1298.26,1376.45 1377,1297.71 1298.26,1218.97 1298.26,1195.35 1400.62,1195.35 1408.5,1203.22 1408.5,1400.08
no net on Top Solder "NONET_L-01_P-001" (solid): 1299.21,1196.85 1299.21,1220.47 1220.47,1299.21 1299.21,1377.95 1299.21,1401.57 1196.85,1401.57 1188.98,1393.7 1188.98,1196.85
GND on Mid-Layer 1 "GND_L02_P037" (solid, pour order 37): 334.65,19.68 334.65,334.65 19.69,334.65 19.69,531.5 334.65,531.5 334.65,1200.79 19.69,1200.79 19.69,1397.64 334.65,1397.64 334.65,2066.93 19.69,2066.93 19.69,2263.78 334.65,2263.78 334.65,2578.74 531.5,2578.74 531.5,2271.65 1200.79,2271.65 1200.79,2578.74 1397.64,2578.74 1397.64,2263.78 1712.6,2263.78 1712.6,2066.93 1397.64,2066.93 1397.64,1397.64 1712.6,1397.64 1712.6,1200.79 1397.64,1200.79 1397.64,531.5 1712.6,531.5 1712.6,334.65 1397.64,334.65 1397.64,19.68 1200.79,19.68 1200.79,334.65 531.5,334.65 531.5,19.68
GND on Mid-Layer 2 "GND_L03_P038" (solid, pour order 38): 334.65,19.68 334.65,334.65 19.69,334.65 19.69,531.5 334.65,531.5 334.65,1200.79 19.69,1200.79 19.69,1397.64 334.65,1397.64 334.65,2066.93 19.69,2066.93 19.69,2263.78 334.65,2263.78 334.65,2578.74 531.5,2578.74 531.5,2271.65 1200.79,2271.65 1200.79,2578.74 1397.64,2578.74 1397.64,2263.78 1712.6,2263.78 1712.6,2066.93 1397.64,2066.93 1397.64,1397.64 1712.6,1397.64 1712.6,1200.79 1397.64,1200.79 1397.64,531.5 1712.6,531.5 1712.6,334.65 1397.64,334.65 1397.64,19.68 1200.79,19.68 1200.79,334.65 531.5,334.65 531.5,19.68

## Silkscreen, mask and mechanical layers (free items; w line width, h text height)
Top Overlay:
  text "COM" at 651.67,2494.19 h40
  text "9" at 809.15,2494.19 h40
  text "8" at 911.51,2494.19 h40
  text "7" at 1016.88,2493.72 h40
  text "8" at 258.03,2443.07 h59.06
  text "7" at 1128.11,2439.13 h59.06
  text "U3_4" at 681,2312.66 h40
  text "U3_1" at 981,2312.66 h40
  text "6" at 1596.61,2301.34 h59.06
  text "9" at 88.74,1974.57 h59.06
  text "U1" at 249.81,1859.92 h40
  text "U4_1" at 89.7,1813.09 h40 r90
  text "U2" at 245.87,1757.56 h40
  text "May 2024" at 1625.77,1678.23 h27 r90
  text "rev 0" at 1506.81,1677.24 h27 r90
  text "Lafe Spietz" at 1564.74,1677.24 h27 r90
  text "U3" at 247.35,1657.45 h40
  text "U4_4" at 87.34,1531 h40 r90
  text "COM" at 289.28,1509.94 h40 r90
  text "5" at 1596.61,1431.26 h59.06
  text "mems-switches-rectangle11" at 1454.51,1414.45 h27 r90
  text "IN/OUT" at 25.75,1116.3 h50
  text "4" at 1654.71,1001.05 h40
  text "U2_1" at 1495.21,974.5 h40 r90
  text "5" at 1652.25,898.74 h40
  text "6" at 1650.73,800.03 h40
  text "COM" at 1686.91,635.92 h40 r90
  text "U2_4" at 1495.21,596.55 h40 r90
  text "4" at 1600.55,569.06 h59.06
  text "1" at 710.72,242.22 h40
  text "2" at 805.21,242.22 h40
  text "3" at 903.64,242.22 h40
  text "COM" at 974.5,242.22 h40
  text "1" at 96.61,238.35 h59.06
  text "3" at 1427.32,96.61 h59.06
  text "2" at 569.06,92.68 h59.06
  text "U1_1" at 643.8,55.97 h40
  text "U1_4" at 954.82,55.97 h40
Bottom Overlay:
  text "COM" at 761.72,2494.19 h40
  text "9" at 836.52,2494.19 h40
  text "8" at 938.88,2494.19 h40
  text "7" at 1044.25,2493.72 h40
  text "8" at 301.02,2439.13 h59.06
  text "7" at 1167.17,2439.13 h59.06
  text "U3_1" at 1131.8,2315.81 h40
  text "U3_4" at 769.59,2311.88 h40
  text "6" at 1635.67,2301.34 h59.06
  text "9" at 127.8,1974.57 h59.06
  text "U4_1" at 85.76,1942.82 h40 r90
  text "U1" at 301.09,1856.39 h40
  text "U2" at 316.83,1757.97 h40
  text "U4_4" at 85.76,1675.1 h40 r90
  text "U3" at 312.9,1659.54 h40
  text "COM" at 289.28,1619.98 h40 r90
  text "5" at 1635.67,1431.26 h59.06
  text "U2_1" at 1491.27,1100.3 h40 r90
  text "4" at 1679.04,1002.06 h40
  text "5" at 1679.04,899.7 h40
  text "6" at 1679.04,801.28 h40
  text "COM" at 1686.91,742.03 h40 r90
  text "U2_4" at 1491.27,734.16 h40 r90
  text "4" at 1635.67,569.06 h59.06
  text "1" at 726.28,242.22 h40
  text "2" at 832.58,242.22 h40
  text "3" at 931.01,242.22 h40
  text "COM" at 1084.55,242.22 h40
  text "1" at 115.98,238.35 h59.06
  text "2" at 608.11,96.61 h59.06
  text "3" at 1466.38,96.61 h59.06
  text "U1_1" at 765.65,59.91 h40
  text "U1_4" at 1088.49,55.97 h40
Top Solder:
  rectangle: 531.5,1396.65 1397.64,2096.46
  pour cut-out: 1388.57,1343.06 1423.57,1343.06 1423.57,1281.01 1388.57,1281.01
  pour cut-out: 415,845 415,885 475,885 475,845
  pour cut-out: 1426.29,2148.98 1392.04,2148.98 1392.04,2203.98 1426.29,2203.98
  pour cut-out: 1255,2255 1255,2290 1320,2290 1320,2255
  pour cut-out: 394.73,2254.01 394.73,2289.01 449.73,2289.01 449.73,2254.01
  pour cut-out: 344.32,2123.01 309.32,2123.01 309.32,2183.01 344.32,2183.01
  pour cut-out: 417.32,1715 417.32,1750 475,1750 475,1715
  pour cut-out: 345,390 310,390 310,450 345,450
  pour cut-out: 415,310 415,345 475,345 475,310
  pour cut-out: 1285,310 1285,343.5 1340,343.5 1340,310
  pour cut-out: 1393.7,470 1425,470 1425,415 1393.7,415
  pour cut-out: 850.39,1338.58 881.89,1338.58 881.89,1283.46 850.39,1283.46
Bottom Solder:
  rectangle: 708.66,1574.8 1023.62,1889.76
  rectangle: 708.66,708.66 1023.62,1023.62
Mechanical 1:
  the board outline again, w10